# EAGLE board SHTC3 Breakout-TopJig (EAGLE 9.1.3)
REVISION: A

Size 38.12 x 38.1 mm. Coordinates in mm from the lower left corner, seen from the top.
Outline: 5.86,30.48 arc-180 7.64,32.26 30.5,32.26 arc-180 32.28,30.48 32.28,7.62 arc-180 30.5,5.84 7.64,5.84 arc-180 5.86,7.62 5.86,10.16 arc100 3.32,12.7 2.56,12.7 arc80 0.02,8.89 0.02,2.54 arc80 2.56,0 35.58,0 arc80 38.12,2.54 38.12,35.56 arc80 35.58,38.1 2.56,38.1 arc80 0.02,35.56 0.02,27.94 arc80 2.56,25.4 3.32,25.4 arc100 5.86,27.94 5.86,30.48
Copper layers (1*16): Top 0.035mm / dielectric 1.5mm / Bottom 0.035mm
Design rules "SparkFun-2-layer-PCBWay-LIMIT": minimum track width 6mil, minimum drill 0.3mm, track to track 6mil, track to pad 6mil, pad to pad 6mil, via to via 6mil, smd to smd 6mil, copper to edge 6mil, drill to drill 6mil, minimum pad ring 6mil, minimum via ring 6mil, stop-mask expansion 4mil, vias tented up to drill 25mil, thermal gap 10mil
Net classes: 1 power: width 0.203 mm
tRestrict: 3 lines
bRestrict: 3 lines
Milling: 3 lines

## Footprints (pad centres in the part's own frame; a part is rotated, then mirrored left to right if it is on the bottom)
STAND-OFF-TIGHT = hole 3.048: 0,0
NUBBIN_LOCKER = hole 2.794: 0,0

## Placement (x,y rotation side)
E$1  [STAND-OFF-TIGHT]  3.2,6.35 0 top
E$2  [STAND-OFF-TIGHT]  3.2,31.75 0 top
E$3  [STAND-OFF-TIGHT]  34.95,6.35 0 top
E$4  [STAND-OFF-TIGHT]  34.95,31.75 0 top
E$5  [NUBBIN_LOCKER]  19.07,3.17 0 top
E$6  [NUBBIN_LOCKER]  19.07,34.92 0 top
FRAME1  FRAME-LETTER  [CREATIVE_COMMONS]  -6.33,-12.7 0 top  (outside the outline)

## Library data of the parts
E$1-E$6 = SparkFun-Hardware
FRAME1 = SparkFun-Aesthetics

## Text on the board
Top: GPS-RTK
Bottom: 596
tPlace: #596 | GPS-RTK | DEV-14566
Measures: Dimensions in inches
tDocu: Bryan Hoff